# Altium PCB Leningrad_orig.PcbDoc (part 2 of 3)
Units mil, origin at the board's own origin, x right, y up, seen from the top; angles counter-clockwise.
Board outline 8070.87 x 4724.41 mil, 2 copper layers (Top Layer, Bottom Layer); 124 components, 165 nets, 1259 pads, 367 vias.
Unrouted connection lines stored in the file: 15.
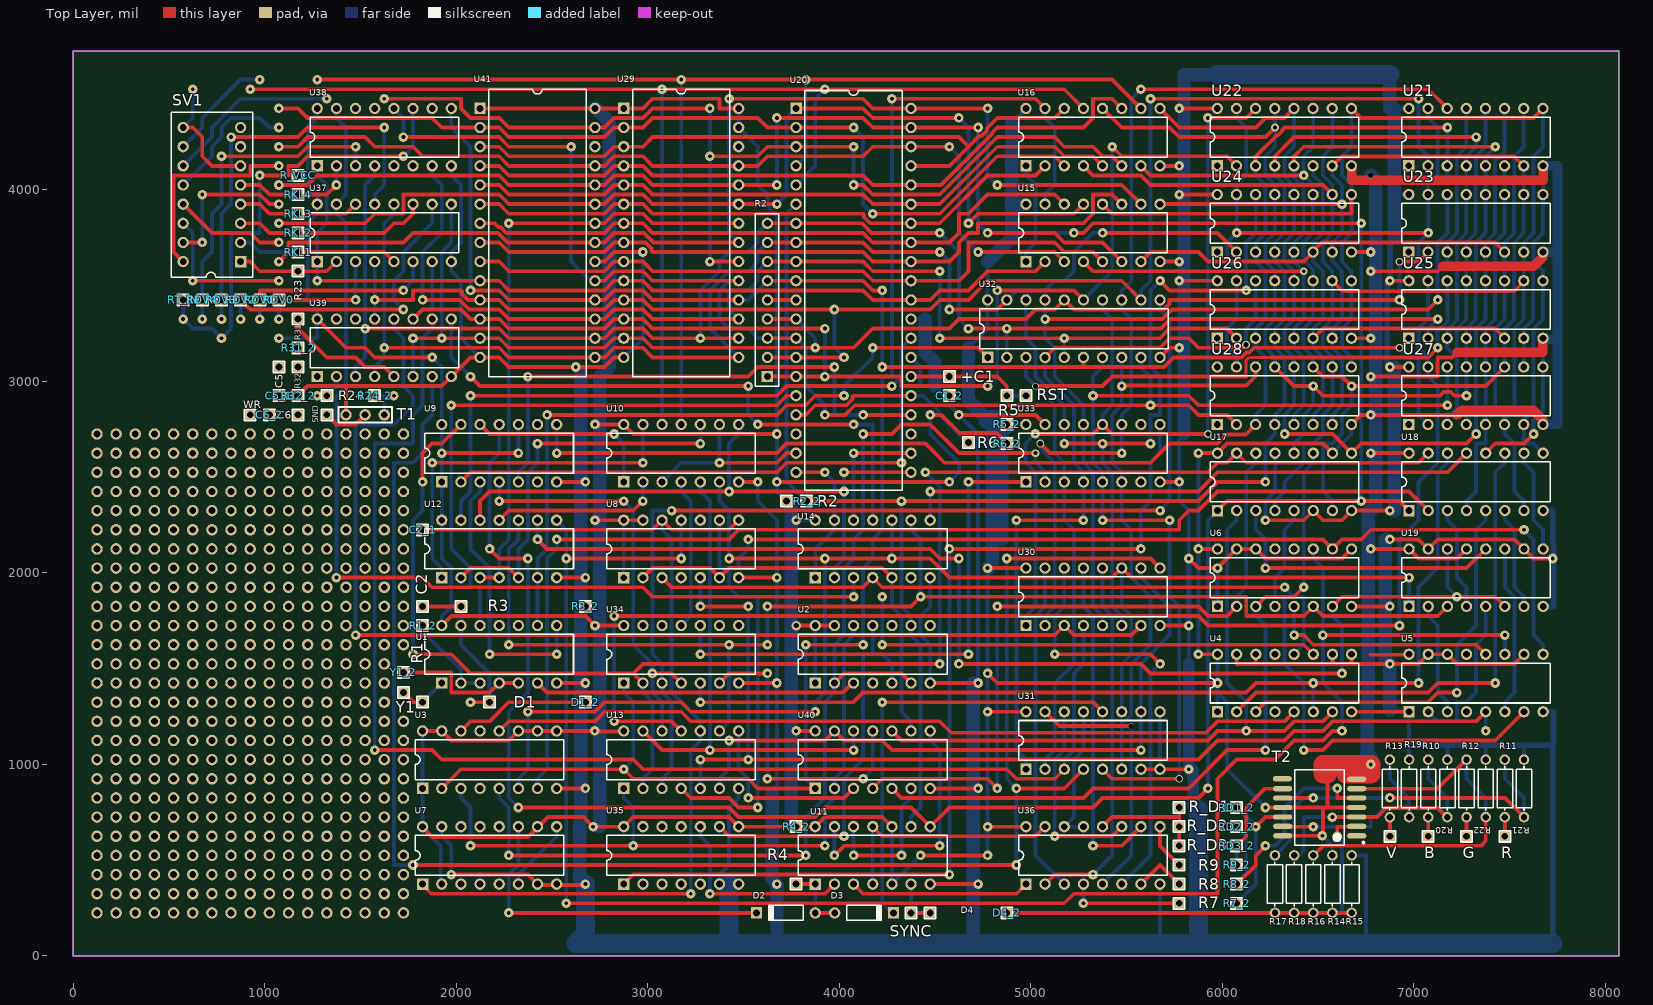
[diagram p0: Top Layer view]

## Via types
v1: diameter 50, hole 20, Top Layer to Bottom Layer, 354 vias
v2: diameter 40, hole 28, Top Layer to Bottom Layer, 6 vias
v3: diameter 40, hole 20, Top Layer to Bottom Layer, 3 vias
v4: diameter 30, hole 28, Top Layer to Bottom Layer, 2 vias
v5: diameter 50, hole 28, Top Layer to Bottom Layer, 1 vias
v6: diameter 35, hole 28, Top Layer to Bottom Layer, 1 vias

## Nets (pads, with @x,y where several pads share a name; then routed paths per layer and width w, separated by ;. In a path a pad name is that pad's centre, name@x,y a point inside that pad or via, vN(x,y) a via of type N, cw(c..) or ccw(c..) an arc to the next point about the centre after c; other vN are vias at no path point) (continued)
GND: (continued)
  Bottom Layer w20: U7.15@1925,670 1925,625 1975,575 v1(1975,425) ; U38.8@1975,4125 1975,4075 2025,4025 2025,3725 1975,3675 U37.8@1975,3625 1975,3575 2025,3525 2025,3225 U41.14@2125,3125 ; v1(2625,3075) 2650,3050 ; U29.14@2875,3125 2975,3225 v1(2975,3675) ; U35.6@3375,375 3375,425 3425,475 3425,775 3475,825 U13.7@3475,875 ; v1(3575,2475) 3575,2375 3675,2275 v1(3675,1975) v1(3675,1425) 3675,875 3650,850 ; U20.29@4375,3325 4450,3325 ; U2.7@4475,1425 4475,1625 4425,1675 4425,1775 4475,1825 U14.7@4475,1975 ; 4500,2975 4550,2925 C1_2.1@4575,2925 4575,2875 v1(4625,2825) 4725,2725 v1(4725,1425) ; 5675,65 U36.8@5675,375 ; U31.8@5675,975 U31.9@5675,1275 ; 5800,2725 5775,2700 v1(5775,2475) 5775,2375 5825,2325 v1(5825,2075) ; 5825,1525 v1(5825,1725) ; U6.1@5975,1825 v1(5975,2025) ; v1(6225,2275) 6225,2375 6275,2425 U17.13@6275,2625 ; R15.1@6675,525 6750,525 6750,65 ; 6875,1282.42 6967.58,1282.42 U5.1@6975,1275 6975,1100 R19.1@6975,1025 ; 6897.72,3975 U23.16@6973.81,3975 ; 6897.72,4422.72 6971.53,4422.72 U21.16@6973.81,4425 ; R20.1@7175,1025 7175,1100 ; R22.1@7375,1025 7375,1100 ; R21.1@7575,1025 7575,1100
  Bottom Layer w30: v1(5825,1725) v1@5825,2070 ; v1@6861.05,3077.72 v1@6861.05,3517.72 ; v1@6875,3531.67 6875,3729.56 6897.72,3752.28 ; 6975,1100 7175,1100 7375,1100 7575,1100 7725,1100 ; U5.8@7675,1275 7729.53,1275 7729.53,1104.53 7725,1100 ; U19.8@7675,1825 7729.53,1825 7729.53,2152.11 7725,2156.64 7725,2325 U18.8@7675,2325 ; 7725,75 7725,1100
  Bottom Layer w60: v1(5825,975) 5825,1525 ; v1@5844.91,975.54 5850,789.53
  Bottom Layer w70: v1@2650,1425 2650,1325 2650,708.99 2645,703.99 2645,405 v1(2675,375) ; 2650,1427.28 2650,3050 ; 3650,400 3650,850 ; 3675,65 v1(3675,375) ; 4450,3325 4450,3150 4500,3100 4500,2975 ; 4700,65 4700,875 v1@4700,1425 ; 5800,2725 5800,3975 5800,4425 5800,4600 5972.62,4600 5973.81,4601.19 ; 5850,789.53 5875,764.53 ; v1@6850,2175 6850,1550 v1(6875,1525) 6875,1282.42 ; 6875,4425 6875,4601.19 ; v1@6897.72,2325 v1@6897.72,3072.72 ; 6897.72,3752.28 6897.72,3975 6897.72,4422.72
  Bottom Layer w100: v1(2675,375) 2675,115 2625,65 3425,65 ; 3425,375 3425,65 ; 5875,764.53 5875,65 ; 5973.81,4601.19 6875,4601.19 ; 7725,65 6750,65 5875,65 ; 3425,65 3675,65 4700,65 5675,65 5875,65
H0: U2.12 U3.3 U13.1 U40.2 | length 3703.6
  Top Layer w20: v1(2075,575) v1(2925,575) v1(3925,575)
  Bottom Layer w20: U3.3@2025,875 2025,825 2075,775 v1(2075,575) ; U13.1@2875,875 2875,825 2925,775 v1(2925,575) ; v1(3925,575) 3925,775 3975,825 U40.2@3975,875 3975,925 4025,975 4025,1625 4075,1675 U2.12@4075,1725
H1: U3.2 U15.15 U16.15 U34.1 U40.1 | length 7898.5
  Top Layer w20: U3.2@1925,875 2025,975 v1(2875,975) 2925,925 3525,925 3575,875 U40.1@3875,875 ; v1(3825,1625) v1(4125,1625) ; v1(4275,4475) 5025,4475 U16.15@5075,4425
  Bottom Layer w20: v1(2875,975) 2925,1025 2925,1325 2875,1375 U34.1@2875,1425 ; v1(3825,1625) 3825,925 U40.1@3875,875 ; v1(4125,1625) 4125,2025 4175,2075 4175,2175 4225,2225 4225,3025 4275,3025 v1(4275,4475) ; U15.15@5075,3925 5075,3975 5125,4025 5125,4325 5075,4375 U16.15@5075,4425
H2: U3.6 U10.6 U14.10 U19.1 U30.11 U31.11 | length 7977.8
  Top Layer w20: v1(2375,1275) 2725,1275 2775,1325 3175,1325 3225,1275 v1(3875,1275) ; v1(3425,2075) v1(3925,2075) v1(4275,2075) 4475,2075 4575,1975 5425,1975 U30.11@5475,2025 5525,1975 v1(6975,1975)
  Bottom Layer w20: U3.6@2325,875 2325,925 2375,975 v1(2375,1275) ; U10.6@3375,2475 3375,2375 3425,2325 v1(3425,2075) ; v1(3875,1275) 3875,1325 3925,1375 v1(3925,2075) ; v1(4275,2075) U14.10@4275,2275 ; U31.11@5475,1275 5475,1525 5525,1575 5525,1775 5475,1825 U30.11@5475,2025 ; U19.1@6975,1825 v1(6975,1975)
H3: U3.7 U18.2 | length 6065.7
  Top Layer w20: v1(2525,2175) 3425,2175 3475,2225 5775,2225 5775,2275 5825,2325 5875,2325 5975,2425 6975,2425 U18.2@7075,2325
  Bottom Layer w20: U3.7@2425,875 2425,925 2475,975 2475,2075 2525,2125 v1(2525,2175)
H4: U4.3 U18.5 | length 2103.6
  Top Layer w20: U4.3@6175,1275 6225,1325 7075,1325 7125,1375 v1(7225,1375)
  Bottom Layer w20: v1(7225,1375) 7225,1625 7325,1725 7325,2225 7375,2275 U18.5@7375,2325
H5: U4.2 U18.11 | length 2632.8
  Top Layer w20: U4.2@6075,1275 6175,1375 7075,1375 7125,1425 v1(7425,1425)
  Bottom Layer w20: v1(7425,1425) 7425,2525 7475,2575 U18.11@7475,2625
H6: U4.6 U18.14 U34.5 | length 5303.6
  Top Layer w20: v1(3275,1325) 4075,1325 4125,1375 6125,1375 6175,1425 v1(6475,1425) v1(7025,1425)
  Bottom Layer w20: v1(3275,1325) U34.5@3275,1425 ; U4.6@6475,1275 v1(6475,1425) ; v1(7025,1425) 7025,1925 7125,2025 7125,2525 7175,2575 U18.14@7175,2625
H7: U4.7 U17.2 U40.10 | length 3595
  Top Layer w20: U40.10@4275,1175 4325,1125 5925,1125 5975,1175 v1(6125,1175) 6325,1175 6375,1225 6525,1225 U4.7@6575,1275
  Bottom Layer w20: U17.2@6075,2325 6075,2275 6025,2225 6025,1425 6125,1325 v1(6125,1175)